# EAGLE board PCA9306_Breakout (EAGLE 6.4)
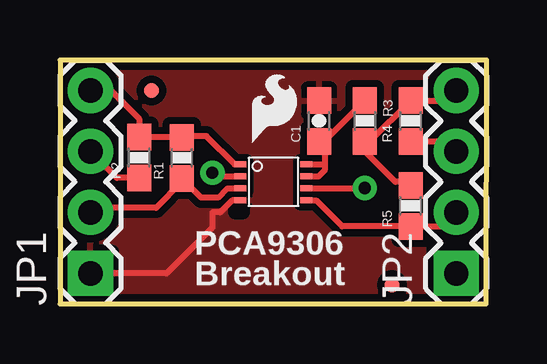
[diagram p0: board, top side]
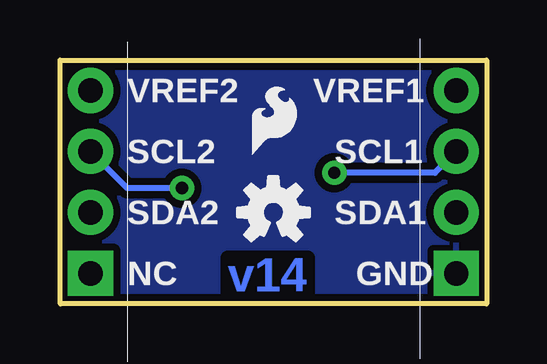
[diagram p1: board, bottom side, seen from below]

Size 17.78 x 10.16 mm. Coordinates in mm from the lower left corner, seen from the top.
Outline: 0,0 17.76,0 17.78,10.16 0,10.16 0,0
Copper layers (1*16): Top 0.035mm / dielectric 1.5mm / Bottom 0.035mm
Design rules "SparkFun *": minimum track width 8mil, minimum drill 20mil, track to track 8mil, track to pad 8mil, pad to pad 8mil, via to via 8mil, smd to smd 8mil, copper to edge 8mil, drill to drill 8mil, minimum pad ring 12mil, minimum via ring 10mil, stop-mask expansion 4mil, vias tented up to drill 20mil, thermal gap 10mil
tRestrict: area 7.3,3.8 to 7.6,4.1

## Footprints (pad centres in the part's own frame; a part is rotated, then mirrored left to right if it is on the bottom)
0603-CAP = smd 1.1 x 1: 1 -0.85,0; 2 0.85,0
1X04 = drill 1.016 pad 1.88 square: 1 0,0 | drill 1.016 pad 1.88: 2 2.54,0; 3 5.08,0; 4 7.62,0
FIDUCIAL-1X2.5 = smd 0.635 x 0.635: 1 0,0
0603-RES = smd 1.1 x 1: 1 -0.85,0; 2 0.85,0
PSOP-8 = smd 0.25 x 0.5: 1 -0.73,-1.37; 2 -0.23,-1.37; 3 0.27,-1.37; 4 0.77,-1.37; 5 0.77,1.38; 6 0.27,1.38; 7 -0.23,1.38; 8 -0.73,1.38

## Placement (x,y rotation side)
C1  0.1uF  [0603-CAP]  10.79,7.62 90 top
FRAME1  FRAME-LETTER  [CREATIVE_COMMONS]  -4.94,-10.16 0 top  (outside the outline)
JP1  [1X04]  1.27,1.27 90 top
JP2  [1X04]  16.51,1.27 90 top
JP3  LOGO-SFESK  [SFE-LOGO-FLAME]  8,6.73 0 top
JP4  LOGO-SFESK  [SFE-LOGO-FLAME]  9.78,6.22 0 bottom
JP7  FIDUCIAL1X2.5  [FIDUCIAL-1X2.5]  3.81,8.89 0 top
JP8  FIDUCIAL1X2.5  [FIDUCIAL-1X2.5]  13.84,0.79 0 top
LOGO1  OSHW-LOGOS  [OSHW-LOGO-S]  8.89,3.81 0 bottom
R1  1k  [0603-RES]  5.08,6.08 90 top
R2  1k  [0603-RES]  3.3,6.1 90 top
R3  200k  [0603-RES]  12.7,7.62 270 top
R4  1k  [0603-RES]  14.61,7.62 90 top
R5  1k  [0603-RES]  14.61,4.08 90 top
U$1  [PSOP-8]  8.89,5.08 270 top

## Library data of the parts
C1 JP1-JP4 R1-R5 = SparkFun
FRAME1 LOGO1 = SparkFun-Aesthetics
JP7 JP8 = abes
U$1 = SparkFun-DigitalIC; PROD_ID: IC-10023

## Nets
GND: C1.2 JP1.1 U$1.4
NC: JP2.1
SCL1: JP1.3 R2.1 U$1.2
SCL2: JP2.3 R4.1 U$1.6
SDA1: JP1.2 R1.1 U$1.3
SDA2: JP2.2 R5.1 U$1.5
VREF1: JP1.4 R1.2 R2.2 U$1.1
VREF2: C1.1 R3.1 U$1.7 U$1.8
VREF_2: JP2.4 R3.2 R4.2 R5.2

## Tracks (layer width: path | path; a pad name or v marks a point on that pad's centre or on a via)
GND
  Top 0.254: U$1.4 7.17,4.31 6.67,3.81 6.35,3.81 6.35,3.17 4.45,1.27 JP1.1
  pour Bottom (isolate 0.305): 0,10.16 17.78,10.16 17.78,0 0,0
  pour Top (isolate 0.305): 0,10.16 17.78,10.16 17.78,0 0,0
SCL1  (via drill 0.51)
  Top 0.254: U$1.2 6.5,5.31 v6.35,5.46 | R2.1 2.37,5.25 JP1.3
  Bottom 0.254: v6.35,5.46 2.16,5.46 JP1.3
SCL2  (via drill 0.51)
  Top 0.254: R4.1 16.09,6.77 JP2.3 | U$1.6 12.68,4.81 v12.7,4.83
  Bottom 0.254: v12.7,4.83 14.99,4.83 JP2.3
SDA1
  Top 0.254: U$1.3 6.97,4.81 6.59,4.43 5.88,4.43 R1.1 5.08,5.08 4,4 1.46,4 JP1.2
SDA2
  Top 0.254: JP2.2 15.93,3.23 R5.1 11.76,3.23 10.68,4.31 U$1.5
VREF1
  Top 0.254: JP1.4 2.12,8.89 3.3,7.71 R2.2 5.06,6.95 R1.2 5.13,6.99 6.1,6.99 7.27,5.81 U$1.1
VREF2
  Top 0.254: R3.1 11,6.77 C1.1 11.05,6.52 11.05,5.71 | U$1.8 10.95,5.81 11.05,5.71 | U$1.7 10.77,5.31 11.05,5.59 11.05,5.71
VREF_2
  Top 0.254: JP2.4 16.09,8.47 R4.2 12.9,6.77 R3.2 12.7,6.35 13.97,5.08 14.46,5.08 R5.2

## Text on the board
Bottom: v14
tPlace: PCA9306 | Breakout
bPlace: VREF1 | VREF2 | SCL1 | SCL2 | SDA1 | SDA2 | GND | NC
tValues: T. Klopfenstein